# Altium PCB Daemi.PcbDoc (part 2 of 2)
Units mm, origin at the board's own origin, x right, y up, seen from the top; angles counter-clockwise.
Board outline 85 x 85 mm, 2 copper layers (Top Layer, Bottom Layer); 151 components, 56 nets, 527 pads, 120 vias.
Unrouted connection lines stored in the file: 9.
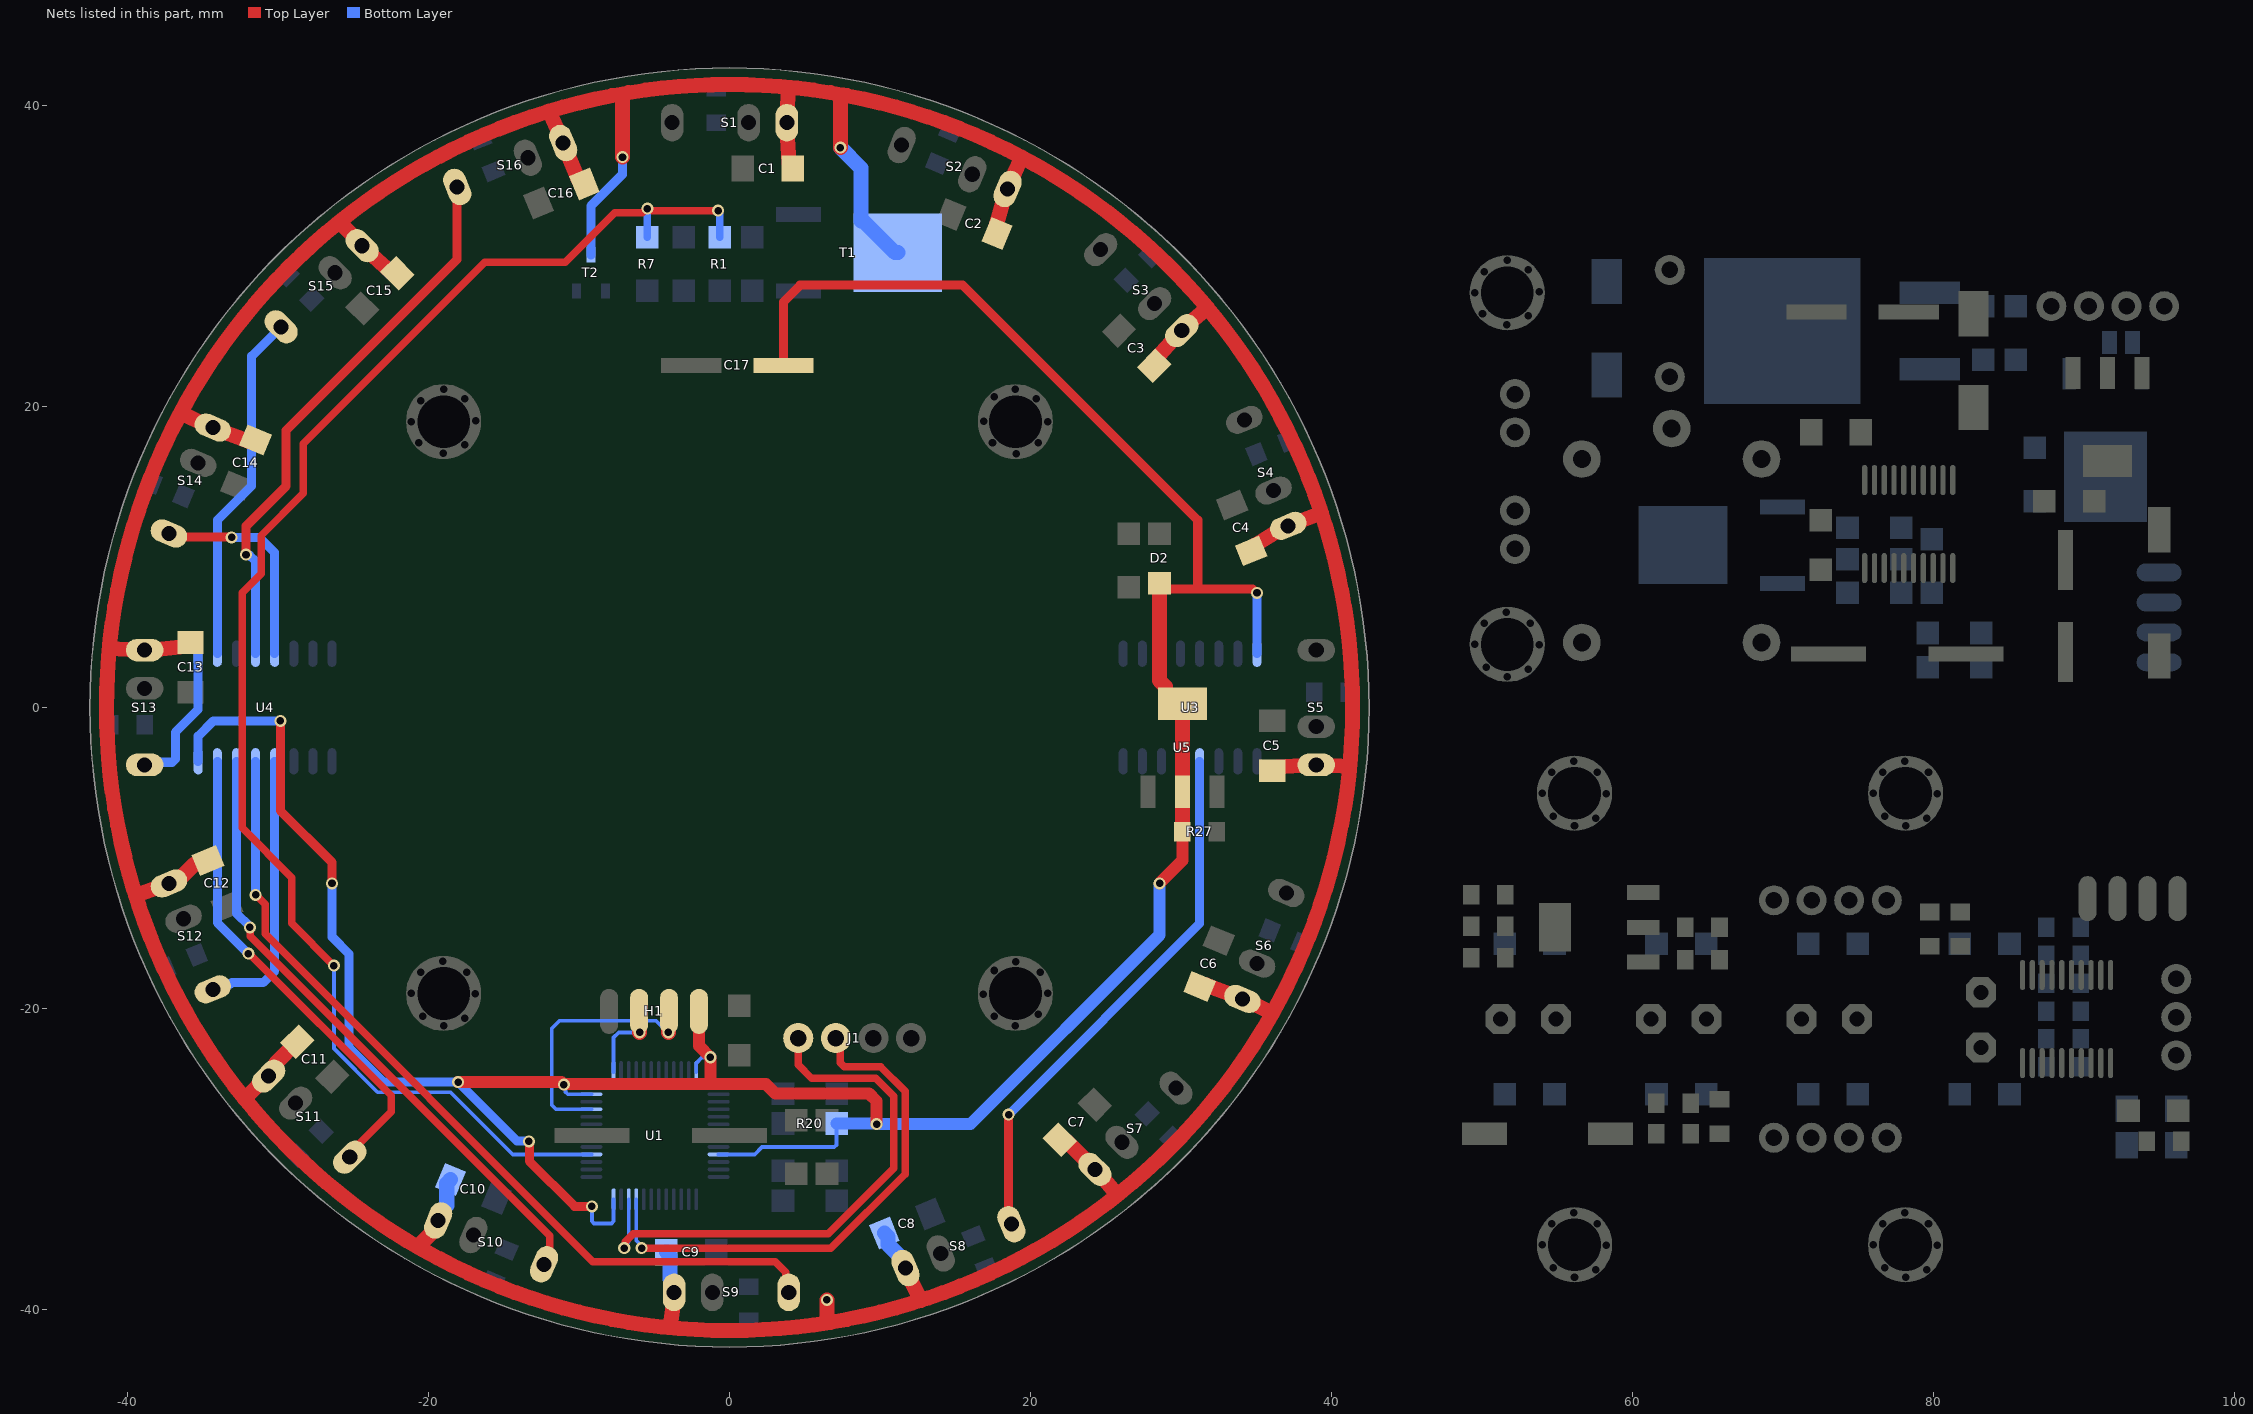
[diagram p2: the nets of this part, all layers, seen from the top]

## Via types
v1: diameter 0.8, hole 0.5, Top Layer to Bottom Layer, tented both sides, 120 vias

## Nets (pads, with @x,y where several pads share a name; then routed paths per layer and width w, separated by ;. In a path a pad name is that pad's centre, name@x,y a point inside that pad or via, vN(x,y) a via of type N, cw(c..) or ccw(c..) an arc to the next point about the centre after c; other vN are vias at no path point) (continued)
S7: S8.3 U3.4 | length 36.1
  Top Layer w0.6: v1(18.542,-27.051) 18.54,-27.053 18.54,-34.147 S8.3@18.73,-34.337
  Bottom Layer w0.6: v1(18.542,-27.051) 31.242,-14.351 U3.4@31.242,-3.575
S8: S9.3 U4.13 | length 57.1
  Top Layer w0.5: v1(-31.496,-12.446) -30.861,-13.081 -30.861,-15.048 -9.079,-36.83 3.048,-36.83 3.746,-37.528 3.746,-38.671 S9.3@3.937,-38.862
  Bottom Layer w0.6: v1(-31.496,-12.446) U4.13@-31.496,-3.575
S9: S10.3 U4.14 | length 42.2
  Top Layer w0.5: v1(-31.877,-14.605) -31.85,-14.632 -31.85,-15.205 -31.289,-15.766 -11.938,-35.117 -11.938,-35.744 -11.943,-35.748 -11.943,-36.616 S10.3@-12.325,-36.999
  Bottom Layer w0.6: U4.14@-32.766,-3.575 -32.766,-13.662 -31.877,-14.551 v1(-31.877,-14.605)
S10: S11.3 U4.15 | length 32.3
  Top Layer w0.5: v1(-31.977,-16.356) -31.906,-16.356 -22.479,-25.783 -22.479,-26.853 -25.237,-29.611 S11.3@-25.237,-29.881
  Bottom Layer w0.6: U4.15@-34.036,-3.575 -34.036,-14.297 v1(-31.977,-16.356)
S11: S12.3 U4.12 | length 18.6
  Bottom Layer w0.6: S12.3@-34.337,-18.73 -33.973,-18.367 -33.152,-18.367 -33.073,-18.288 -30.988,-18.288 -30.226,-17.526 U4.12@-30.226,-3.575
S12: S13.3 U4.1 | length 9.8
  Bottom Layer w0.6: S13.3@-38.862,-3.81 -38.69,-3.638 -37.039,-3.638 -36.83,-3.429 -36.83,-1.651 -35.306,-0.127 U4.1@-35.306,3.575
S13: S14.3 U4.5 | length 14.3
  Top Layer w0.6: S14.3@-37.253,11.563 -37.027,11.337 -33.12,11.337 v1(-33.086,11.303)
  Bottom Layer w0.6: v1(-33.086,11.303) -31.242,11.303 -30.226,10.287 U4.5@-30.226,3.575
S14: S15.3 U4.2 | length 23.5
  Bottom Layer w0.6: U4.2@-34.036,3.575 -34.036,12.446 -31.75,14.732 -31.75,23.346 S15.3@-29.798,25.299
S15: S16.3 U4.4 | length 37.2
  Top Layer w0.6: v1(-32.131,10.16) -32.131,12.053 -29.464,14.72 -29.464,18.415 -18.095,29.784 -18.095,33.694 -18.076,33.713 -18.076,34.572 S16.3@-18.095,34.591
  Bottom Layer w0.6: v1(-32.131,10.16) -32.093,10.122 -31.909,10.122 -31.496,9.709 U4.4@-31.496,3.575
S_GND: C1.2 C2.2 C3.2 C4.2 C5.2 C6.2 C7.2 C8.2 C9.2 C10.2 C11.2 C12.2 C13.2 C14.2 C15.2 C16.2 S1.1 S2.1 S3.1 S4.1 S5.1 S6.1 S7.1 S8.1 S9.1 S10.1 S11.1 S12.1 S13.1 S14.1 S15.1 S16.1 T1.4 T2.3 | length 373
  Top Layer w1: -41.213,3.931 -39.362,3.81 S13.1@-38.862,3.81 -38.362,3.81 -36.189,4.068 C13.2@-35.814,4.318 ; -39.474,-12.479 -37.715,-11.882 S12.1@-37.253,-11.69 -36.847,-11.69 -35.561,-10.404 -34.911,-10.404 C12.2@-34.665,-10.157 ; -36.48,19.575 -34.799,18.795 S14.1@-34.337,18.603 -33.875,18.412 -31.941,17.694 C14.2@-31.499,17.781 ; -32.216,-26.001 -30.708,-24.493 S11.1@-30.625,-24.493 -30.176,-24.044 -30.176,-23.65 C11.2@-28.726,-22.201 ; -25.924,32.278 -24.763,31.04 S15.1@-24.41,30.687 -24.056,30.333 -22.516,28.942 C15.2@-22.074,28.853 ; -20.526,-35.953 -20.526,-35.65 -19.365,-34.489 S10.1@-19.365,-34.083 S10.1@-19.365,-33.677 ; -11.978,39.629 -11.247,37.969 S16.1@-11.055,37.507 -10.864,37.045 -10.026,35.049 C16.2@-9.652,34.798 C16.2@-9.652,34.449 ; -7.198,40.726 -7.112,40.64 v1(-7.112,36.576) ; -3.943,-41.212 -3.683,-39.362 S9.1@-3.683,-38.862 S9.1@-3.683,-38.362 ; 3.919,41.214 3.81,39.362 S1.1@3.81,38.862 3.81,38.362 3.941,36.189 C1.2@4.191,35.814 ; v1(6.477,-39.37) 6.477,-40.724 6.62,-40.867 ; v1(7.366,37.211) 7.366,40.546 7.529,40.71 ; S8.1@11.499,-36.791 S8.1@11.69,-37.253 11.882,-37.715 12.71,-39.401 ; C2.2@17.783,31.502 17.695,31.945 18.285,34.002 S2.1@18.476,34.464 18.668,34.926 19.423,36.561 ; C7.2@21.947,-28.726 22.389,-28.815 23.929,-30.333 S7.1@24.283,-30.687 24.636,-31.04 25.769,-32.403 ; C3.2@28.218,22.709 28.307,23.151 29.698,24.691 S3.1@30.052,25.045 30.405,25.398 31.752,26.566 ; C6.2@31.245,-18.543 31.687,-18.456 33.621,-19.174 S6.1@34.083,-19.365 34.545,-19.557 36.07,-20.321 ; C4.2@34.668,10.413 34.919,10.787 36.664,11.88 S4.1@37.126,12.071 37.588,12.263 39.326,12.94 ; C5.2@36.068,-4.191 36.443,-3.941 38.489,-3.81 S5.1@38.989,-3.81 39.489,-3.81 41.213,-3.931 ; 41.4,0 ccw(c0,0) 41.4,0
  Bottom Layer w0.6: T2.3@-9.205,30.086 -9.205,33.34 -7.112,35.433 v1(-7.112,36.576)
  Bottom Layer w1: S10.1@-19.365,-34.083 -19.365,-33.677 -18.79,-33.102 -18.79,-31.619 C10.2@-18.543,-31.372 ; C9.2@-4.191,-36.195 -3.941,-36.445 -3.941,-37.969 -3.683,-38.227 S9.1@-3.683,-38.862 ; v1(7.366,37.211) 8.736,35.841 8.736,32.326 8.89,32.326 10.99,30.226 T1.4@11.186,30.226 ; C8.2@10.286,-34.922 10.532,-35.168 10.532,-35.689 11.69,-36.847 S8.1@11.69,-37.253
SCL: J1.2 U1.21 | length 35.3
  Top Layer w0.5: v1(-5.842,-35.93) 6.742,-35.93 11.672,-31 11.672,-25.515 10.033,-23.876 7.634,-23.876 7.352,-23.594 7.352,-22.258 J1.2@7.065,-21.971
  Bottom Layer w0.25: U1.21@-6.203,-32.673 -6.203,-35.42 -5.842,-35.781 v1(-5.842,-35.93)
SDA: J1.1 U1.22 | length 37.5
  Top Layer w0.5: v1(-6.996,-35.93) -6.939,-35.873 -6.939,-35.514 -6.388,-34.963 6.566,-34.963 10.922,-30.607 10.922,-25.826 9.722,-24.626 5.449,-24.626 4.565,-23.742 J1.1@4.565,-21.971
  Bottom Layer w0.25: v1(-6.996,-35.93) -6.996,-35.802 -6.703,-35.509 U1.22@-6.703,-32.673
SENSOR_EN: R1.2 R7.2 U1.28 | length 102.2
  Top Layer w0.5: v1(-26.289,-17.145) -29.083,-14.351 -29.083,-11.303 -32.385,-8.001 -32.385,7.62 -31.115,8.89 -31.115,11.43 -28.321,14.224 -28.321,17.543 -16.273,29.591 -10.922,29.591 -7.62,32.893 -5.796,32.893 -5.542,33.147 v1(-5.461,33.147) -5.404,33.09 -5.191,33.09 -5.122,33.02 v1(-0.762,33.02)
  Bottom Layer w0.25: v1(-26.289,-17.145) -26.289,-22.661 -23.383,-25.567 -18.54,-25.567 -14.409,-29.698 U1.28@-9.178,-29.698
  Bottom Layer w0.5: R7.2@-5.461,31.242 v1(-5.461,33.147) ; v1(-0.762,33.02) -0.762,32.939 -0.635,32.812 R1.2@-0.635,31.242
SWCLK: H1.3 U1.37 | length 5.6
  Top Layer w0.25: H1.3@-6.054,-20.235 H1.3@-6.011,-20.193
  Top Layer w1: H1.3@-6.054,-20.235 -5.973,-20.316 -5.973,-21.586 v1(-5.969,-21.59)
  Bottom Layer w0.25: U1.37@-7.703,-24.223 -7.703,-21.927 -7.366,-21.59 v1(-5.969,-21.59)
SWIO: H1.2 U1.34 | length 17.5
  Top Layer w1: v1(-4.064,-21.59) -4.06,-21.586 -4.06,-20.231 H1.2@-4.022,-20.193
  Bottom Layer w0.25: U1.34@-9.178,-26.698 -11.529,-26.698 -11.811,-26.416 -11.811,-21.336 -11.29,-20.815 -4.879,-20.815 -4.104,-21.59 v1(-4.064,-21.59)
VCC: C17.2 D2.1 H1.1 R20.1 R27.2 U1.9 U1.24 U1.36 U1.48 U3.16 U4.16 U5.2 U5.4 | length 210.6
  Top Layer w0.6: v1@-29.845,-0.943 -29.845,-6.858 -26.416,-10.287 v1(-26.416,-11.684) ; v1(-13.335,-28.829) -13.297,-28.867 -13.297,-30.137 -10.287,-33.147 v1(-9.144,-33.147) ; C17.2@3.578,22.736 3.578,26.946 4.699,28.067 15.494,28.067 31.115,12.446 31.115,7.874 ; D2.1@28.575,8.255 28.956,7.874 31.115,7.874 ; v1(35.052,7.62) 34.998,7.62 34.744,7.874 31.115,7.874
  Top Layer w0.8: v1(-18.034,-24.892) -11.176,-24.892 v1(-11.007,-25.061) -10.965,-25.019 -1.27,-25.019 ; H1.1@-2.032,-20.193 -2.032,-22.479 v1(-1.27,-23.241) -1.27,-25.019 ; v1(9.779,-27.686) 9.779,-26.162 9.271,-25.654 3.048,-25.654 2.413,-25.019 -1.27,-25.019 ; v1(28.575,-11.684) 30.099,-10.16 R27.2@30.099,-8.255
  Top Layer w1: D2.1@28.575,8.255 28.575,1.782 28.974,1.383 28.974,0.833 29.549,0.258 U5.4@30.099,0.258 U5.2@30.099,-5.592 R27.2@30.099,-8.255
  Bottom Layer w0.25: v1(-11.007,-25.061) -10.902,-25.166 -10.902,-25.547 -10.753,-25.696 U1.36@-9.178,-25.696 ; v1(-9.144,-33.147) -9.144,-34.144 -8.998,-34.29 -7.849,-34.29 -7.703,-34.144 U1.24@-7.703,-32.673 ; U1.48@-2.203,-24.223 -2.203,-23.623 -1.844,-23.264 -1.293,-23.264 v1(-1.27,-23.241) ; U1.9@-0.728,-29.698 1.671,-29.698 2.159,-29.21 6.966,-29.21 7.112,-29.064 R20.1@7.112,-27.644
  Bottom Layer w0.6: U4.16@-35.306,-3.575 -35.306,-1.905 -34.29,-0.889 v1(-29.845,-0.889) ; v1(-26.416,-11.684) -26.416,-15.24 -25.273,-16.383 -25.273,-22.606 -22.987,-24.892 v1@-18.024,-24.892 ; v1@-17.996,-24.93 -14.135,-28.791 -13.373,-28.791 v1(-13.335,-28.829) ; U3.16@35.052,3.575 v1(35.052,7.62)
  Bottom Layer w0.8: R20.1@7.112,-27.644 9.737,-27.644 v1(9.779,-27.686) 16.002,-27.686 28.575,-15.113 v1(28.575,-11.684)
pads on no net: 1. 1.1 2. 2.1 3. 3.1 ?. ?.1 _1. _1.1 _2. _2.1 C1_1.1 C1_1.2 C2_1.1 C2_1.2 C3_1.1 C3_1.2 C20.1 C20.2 CAP.1 CAP.2 D1_1.1 D1_1.2 D1_2.1 D1_2.2 D2_1.1 D2_1.2 D2_2.1 D2_2.2 D3.1 D3.2 D3_1.1 D3_1.2 D4.1 D4.2 D4_1.1 D4_1.2 D5.1 D5.2 D6.1 D6.2 D7.1 D7.2 D8.1 D8.2 D9.1 D9.2 FDD.1 FDD.3 FDD.4 H1_1.1 H1_1.2 H1_1.3 H1_1.4 I1.1 I1.2 IRF.1 IRF.3 IRF.4 J1_1.1 J1_1.2 J1_1.3 J1_1.4 J2.1 J2.2 J2.3 J3.1 J3.2 J3.3 J3.4 PROG.1 PROG.2 PROG.3 PROG.4 R1_1.1 R1_1.2 R2_1.1 R2_1.2 R3_1.1 R3_1.2 R3_2.1 R3_2.2 R4_1.1 R4_1.2 R4_2.1 R4_2.2 R5_1.1 R5_1.2 R5_2.1 R5_2.2 R6_1.1 R6_1.2 R6_2.1 R6_2.2 R7_1.1 R7_1.2 R7_2.1 R7_2.2 R8_1.1 R8_1.2 R8_2.1 R8_2.2 R9_1.1 R9_1.2 R9_2.1 R9_2.2 R10_1.1 R10_1.2 R10_2.1 R10_2.2 R11_1.1 R11_1.2 R11_2.1 R11_2.2 R12_1.1 R12_1.2 R13_1.1 R13_1.2 R14_1.1 R14_1.2 R15_1.1 R15_1.2 R16_1.1 R16_1.2 R17_1.1 R17_1.2 RELAY.1 RELAY.2 RELAY.3 RELAY.4 RELAY.5 S1_1.1 S1_1.2 S2_1.1 S2_1.2 S3_1.1 S3_1.2 S4_1.1 S4_1.2 SHOOT.1 SHOOT.2 STM32.1 STM32.2 STM32.3 STM32.4 STM32.5 STM32.6 STM32.7 STM32.8 STM32.9 STM32.10 STM32.11 STM32.12 STM32.13 STM32.14 STM32.15 STM32.16 STM32.17 STM32.18 STM32.19 STM32.20 SW1.1 SW1.2 SW1_1.1 SW1_1.2 U1.1 U1.3 U1.4 U1.12 U1.13 U1.14 U1.15 U1.16 U1.17 U1.18 U1.19 U1.20 U1.29 U1.30 U1.31 U1.32 U1.33 U1.38 U1.39 U1.40 U1.41 U1.42 U1.43 U1.45 U1.46 U1_1.1 U1_1.2 U1_1.3 U1_1.4 U1_1.5 U1_1.6 U1_1.7 U1_1.8 U1_1.9 U1_1.10 U1_1.11 U1_1.12 U1_1.13 U1_1.14 U1_1.15 U1_1.16 U1_1.17 U1_1.18 U1_1.19 U1_1.20 U1_2.1 U1_2.2 U2_1.1 U2_1.2 U2_1.3 U2_1.4 U141.1 U141.2 U173.1 U173.3 U173.4 U174.1 U174.2 U174.3 U174.4 U175.1 U175.2 U175.3 U175.4 U177.1 U177.2
copper on no net: | length 1450.3
  Top Layer w0.3: v1(49.911,-24.257) 49.911,-24.19 49.552,-23.831 49.552,-18.21 49.728,-18.034 51.132,-18.034 51.308,-17.858 51.308,-16.891 51.562,-16.637 ; 51.247,-20.701 53.934,-23.388 78.982,-23.388 79.744,-23.388 81.154,-24.798 81.154,-25.56 81.154,-26.861 81.154,-27.544 83.137,-29.528 88.328,-29.528 91.127,-26.729 91.127,-23.626 91.127,-22.176 91.333,-21.97 92.701,-21.97 92.956,-22.225 v1(93.091,-22.225) ; 58.547,-28.321 58.547,-24.553 59.162,-23.938 79.517,-23.938 80.604,-25.025 80.604,-27.772 82.06,-29.228 v1@82.06,-30.078 ; 61.247,-20.701 61.411,-20.865 62.521,-20.865 64.494,-22.838 79.21,-22.838 79.972,-22.838 81.704,-24.57 81.704,-25.332 81.704,-26.633 81.704,-27.316 83.365,-28.978 88.101,-28.978 90.477,-26.601 90.477,-23.626 90.477,-21.6 90.657,-21.42 93.591,-21.42 93.906,-21.105 v1(94.042,-21.105) ; 69.399,-28.59 69.399,-26.7 70.74,-25.358 78.698,-25.358 79.121,-25.781 79.121,-27.316 78.725,-27.712 v1(78.725,-27.848) ; v1(70.866,6.223) 74.93,6.223 75.434,6.727 75.434,9.267 ; 71.247,-20.701 71.505,-20.959 72.521,-20.959 73.85,-22.288 79.438,-22.288 80.2,-22.288 82.254,-24.342 82.254,-25.104 82.254,-26.405 82.254,-27.089 83.593,-28.428 87.873,-28.428 89.827,-26.473 89.827,-23.626 89.827,-21.472 90.452,-20.847 92.564,-20.847 92.699,-20.712 92.956,-20.712 v1(93.052,-20.616) ; 71.899,-28.59 71.899,-26.526 72.517,-25.908 77.216,-25.908 77.526,-26.218 77.526,-26.251 77.936,-26.662 v1(77.936,-26.797) ; v1(73.279,14.732) 73.918,14.093 73.918,12.823 74.168,12.573 75.899,12.573 76.074,12.749 76.074,15.107 76.084,15.117 ; v1(74.295,15.875) 74.336,15.834 75.411,15.834 75.434,15.81 75.434,15.117 ; 74.405,-12.812 75.914,-11.303 80.254,-11.303 80.847,-11.896 86.969,-11.896 87.877,-12.804 87.877,-17.776 ; 75.184,18.288 75.438,18.542 78.034,18.542 ; 76.905,-12.812 77.23,-12.487 77.89,-12.487 77.931,-12.446 86.741,-12.446 87.227,-12.932 87.227,-17.776 ; 77.384,9.267 77.384,5.801 77.851,5.334 v1(79.121,5.334) ; 78.034,15.117 78.034,18.542 ; v1(81.407,-11.092) 81.542,-11.092 81.796,-11.346 87.197,-11.346 88.527,-12.676 88.527,-17.776 ; 81.788,-13.589 82.188,-13.989 82.397,-13.989 83.521,-15.113 84.93,-15.113 85.106,-15.289 85.106,-19.574 85.725,-20.193 v1@87.503,-20.193 ; v1(82.076,-30.078) 88.556,-30.078 91.777,-26.857 91.777,-23.626 ; 83.152,-22.606 82.804,-22.954 82.804,-26.861 83.821,-27.878 87.645,-27.878 89.177,-26.346 89.177,-23.626 89.177,-21.345 90.225,-20.297 92.114,-20.297 92.726,-19.685 93.591,-19.685 93.845,-19.939 v1(93.98,-19.939) ; 83.152,-18.923 83.152,-19.176 84.709,-20.733 84.709,-26.797 85.24,-27.328 87.417,-27.328 88.527,-26.218 88.527,-23.626 ; v1(83.312,-13.335) 83.447,-13.335 83.705,-13.077 85.34,-13.077 86.577,-14.314 86.577,-17.776 ; v1(84.836,-14.097) 84.932,-14.193 85.409,-14.193 85.927,-14.711 85.927,-17.776 ; 85.927,-23.626 85.937,-23.616 85.937,-21.505 86.265,-21.177 88.567,-21.177 90.018,-19.726 91.907,-19.726 93.345,-18.288 v1(93.345,-16.637) ; v1(86.768,-26.262) 87.53,-26.262 87.877,-25.915 87.877,-23.626 ; v1(87.503,-19.939) v1@87.503,-20.193 ; 90.255,-12.7 90.255,-15.282 89.177,-16.36 89.177,-17.776 89.167,-17.786 89.167,-19.418 88.392,-20.193 v1@87.503,-20.193 ; 90.477,-17.776 90.477,-16.076 91.313,-15.24 95.377,-15.24 96.139,-16.002 96.139,-18.034 ; 91.567,16.379 91.055,16.891 80.981,16.891 79.33,18.542 78.034,18.542 ; 94.18,-28.829 94.488,-28.521 94.488,-24.765 96.139,-23.114 ; 96.139,-20.574 97.602,-19.111 97.602,-15.814 96.248,-14.46 96.248,-12.725 96.224,-12.7
  Top Layer w0.35: 72.517,12.446 73.015,11.948 78.242,11.948 79.334,13.04 79.334,15.117 ; 73.025,3.556 73.35,3.881 75.89,3.881 76.084,4.075 76.084,9.267 ; 76.734,9.267 76.734,4.165 77.089,3.81 81.915,3.81 82.169,3.556 ; 78.034,9.267 78.034,6.802 78.486,6.35 86.233,6.35 86.614,5.969 86.614,3.937 86.868,3.683 88.392,3.683 ; 78.684,15.117 78.684,16.454 v1(79.121,16.891) ; 79.984,9.267 79.984,11.658 v1(80.01,11.684) ; 80.634,15.117 80.634,13.346 81.28,12.7 83.82,12.7 84.836,13.716 v1(84.836,16.002)
  Top Layer w0.5: 49.276,-12.446 49.276,-14.541 49.276,-16.637 49.276,-16.737 48.852,-17.161 48.852,-25.361 49.145,-25.654 53.848,-25.654 54.483,-26.289 54.483,-29.21 55.118,-29.845 63.53,-29.845 63.881,-29.494 v1(63.881,-28.575) ; 65.786,-28.321 66.086,-28.021 66.721,-28.021 70.084,-24.658 71.608,-24.658 71.628,-24.638 79.248,-24.638 79.883,-25.273 79.883,-28.509 80.772,-29.398 v1(80.772,-29.479) ; 65.786,-26.035 65.827,-26.035 66.127,-25.735 66.127,-25.115 66.42,-24.822 67.664,-24.822 v1(67.691,-24.849) ; 65.786,-16.764 67.108,-16.764 68.072,-15.8 v1(68.072,-15.748) ; v1(69.963,8.255) 69.963,13.956 71.882,15.875 71.882,18.288 ; v1(89.874,-29.897) 89.927,-29.951 93.158,-29.951 94.18,-28.929 94.18,-28.829 ; 92.964,-26.797 93.345,-26.416 93.345,-23.368 96.139,-20.574
  Top Layer w0.6: 51.562,-14.541 52.768,-14.541 v1(52.832,-14.605) ; 51.562,-12.446 52.832,-12.446 53.594,-11.684 v1(55.118,-11.684) ; 56.642,16.51 56.642,16.129 58.039,14.732 62.992,14.732 68.707,20.447 78.486,20.447 81.292,17.641 86.094,17.641 v1(87.503,19.05) ; v1(59.944,-25.654) 59.998,-25.654 60.283,-25.939 61.345,-25.939 61.595,-26.189 61.595,-26.289 ; 71.905,-12.812 73.571,-14.478 78.232,-14.478 78.871,-13.839 79.506,-13.839 79.756,-13.589 81.788,-13.589 ; v1(79.756,-17.653) 79.756,-15.875 ; v1@81.636,11.811 85.925,11.811 86.052,11.938 v1(86.106,11.938) ; v1(81.788,-17.145) 81.788,-15.875 ; v1(90.896,-28.875) 92.283,-28.875 92.964,-28.194 92.964,-26.797 ; 94.546,12.954 94.996,12.504
  Top Layer w0.8: 63.881,-26.289 63.881,-28.321 65.786,-28.321 ; v1(84.836,10.033) 84.958,10.033 85.212,10.287 88.77,10.287 ; 88.643,10.287 88.643,10.88
  Top Layer w1: 54.93,-20.701 54.895,-20.666 54.895,-18.542 ; v1(57.912,-16.891) 57.926,-16.905 60.71,-16.905 63.45,-16.905 63.5,-16.855 63.5,-16.764 ; 58.547,-28.321 61.595,-28.321 ; 60.71,-12.305 65.186,-12.305 65.693,-12.812 ; 63.5,-14.605 60.71,-14.605 54.86,-14.605 54.895,-14.64 54.895,-18.542 ; 64.637,-19.939 64.637,-19.128 64.051,-18.542 54.895,-18.542 ; 64.637,-19.685 69.342,-19.685 70.612,-18.415 72.644,-18.415 75.223,-20.994 75.801,-20.994 76.016,-21.209 80.796,-21.209 83.082,-18.923 83.152,-18.923 ; 64.93,-20.701 64.93,-19.939 ; 65.786,-14.605 65.786,-12.905 65.693,-12.812 ; v1(68.834,-18.326) 69.405,-17.755 69.405,-12.812 65.693,-12.812 ; v1(69.963,8.255) 71.628,8.255 72.517,9.144 ; 71.882,26.286 72.241,26.286 72.241,29.052 72.136,29.157 ; 78.359,23.622 78.359,26.289 ; 82.677,19.939 82.677,20.328 83.177,20.828 v1(87.122,20.828) ; 88.773,3.683 88.773,3.464 91.44,3.464 ; 89.267,22.229 89.267,23.608 89.535,23.876 89.535,23.925 90.121,24.511 91.821,24.511 92.646,25.336 92.646,26.479 92.837,26.67 ; 91.567,22.229 91.567,16.379 91.567,3.591 91.44,3.464 ; v1(93.853,23.876) 93.867,23.862 93.867,22.229 ; 94.871,3.304 94.996,3.179 v1(94.996,2.921) 94.996,3.214 94.746,3.464 91.44,3.464 ; 94.996,3.429 94.996,4.179 ; 94.996,11.811 94.996,12.504 94.996,12.561 95.631,13.196 95.631,26.105 95.337,26.399 95.337,26.67 ; 96.266,-26.797 96.416,-26.947 96.416,-28.779 96.466,-28.829
  Top Layer w2: 62.484,21.971 65.278,21.971 66.929,23.622 78.359,23.622 ; v1(69.963,8.255) 60.071,8.255 55.245,13.081 52.197,13.081 52.197,18.288 53.848,18.288 57.15,21.59 57.15,24.003 58.674,25.527 63.5,25.527 67.13,29.157 72.136,29.157 91.665,29.157 92.837,27.985 92.837,26.67 ; 77.851,23.622 81.034,20.439 82.677,20.439 82.677,20.328 ; 82.677,26.035 82.677,26.289 87.456,26.289 87.837,26.67
  Bottom Layer w0.3: v1(70.866,6.223) 70.866,3.429 71.629,2.666 79.629,2.666 ; 74.405,-12.812 74.645,-12.812 77.978,-16.145 77.978,-26.755 v1(77.936,-26.797) ; 76.905,-12.812 76.905,-14.294 78.74,-16.129 78.74,-27.833 v1(78.725,-27.848) ; v1(81.407,-11.092) 81.407,-11.176 80.56,-12.023 80.56,-18.323 81.16,-18.923 83.152,-18.923 ; v1(83.312,-13.335) 83.989,-12.658 93.303,-12.658 v1(94.234,-13.589) ; 84.512,-15.156 85.057,-15.701 ; v1(84.836,-14.097) 85.725,-14.097 86.614,-13.208 91.813,-13.208 92.067,-13.462 v1(92.202,-13.462) ; v1(86.768,-26.262) 86.587,-26.262 86.336,-26.011 86.336,-17.71 86.357,-17.689 86.357,-14.862 86.614,-14.605 87.503,-14.605 ; 89.789,-23.88 90.629,-23.88 90.805,-23.704 90.805,-22.417 90.981,-22.241 93.075,-22.241 v1(93.091,-22.225) ; 89.789,-22.025 89.789,-21.925 90.293,-21.421 93.59,-21.421 93.906,-21.105 v1(94.042,-21.105) ; 89.789,-20.17 89.789,-20.183 90.189,-20.583 90.189,-20.616 v1(93.052,-20.616) ; 89.789,-18.315 89.789,-18.415 90.189,-18.815 90.57,-18.815 91.313,-19.558 93.554,-19.558 93.935,-19.939 v1(93.98,-19.939) ; 89.789,-16.46 93.033,-16.46 93.21,-16.637 v1(93.345,-16.637)
  Bottom Layer w0.35: 62.611,18.542 62.865,18.796 71.247,18.796 71.882,18.161 71.882,14.732 73.72,12.894 73.72,12.513 74.295,11.938 ; 77.851,9.865 78.064,9.652 81.456,9.652 81.661,9.857 81.661,11.732 v1(81.582,11.811) ; v1(79.121,16.891) 79.121,21.904 79.696,22.479 79.756,22.479 ; 79.883,7.62 80.064,7.439 80.953,7.439 81.407,6.985 81.407,3.169 81.91,2.666 83.185,2.666
  Bottom Layer w0.6: v1(59.944,-25.654) 59.968,-25.678 61.575,-25.678 61.598,-25.701 ; 71.905,-12.812 70.351,-14.366 67.295,-14.366 66.61,-15.051 66.61,-25.462 68.184,-27.036 73.763,-27.036 74.131,-27.404 74.131,-28.322 74.399,-28.59 ; v1(73.279,14.732) 74.306,13.705 82.231,13.705 82.582,13.354 82.582,7.966 85.041,5.507 91.905,5.507 92.416,4.995 94.996,4.995 ; v1(74.295,15.875) 75.565,14.605 82.645,14.605 83.482,13.768 83.482,8.434 83.693,8.223 83.693,8.128 85.414,6.407 92.132,6.407 92.71,6.985 95.123,6.985 ; v1(79.756,-17.653) 79.756,-23.702 81.755,-25.701 ; v1(80.772,-29.479) 80.772,-29.425 81.223,-28.973 81.223,-28.829 88.773,-28.829 89.841,-29.897 v1(89.874,-29.897) ; 81.755,-15.701 81.772,-15.717 81.772,-17.129 v1(81.788,-17.145) ; 83.152,-18.923 85.057,-18.923 ; 83.185,4.953 83.531,4.607 91.532,4.607 93.133,3.006 v1@94.996,3.006 ; v1(84.836,16.002) 84.836,16.056 85.09,16.31 85.09,22.733 85.471,23.114 ; v1(86.106,11.938) 86.16,11.938 87.049,11.049 v1(95.25,11.049) ; 87.503,-16.46 87.503,-18.315 v1(87.503,-19.939) 87.503,-20.17 87.503,-22.025 87.503,-23.88 87.753,-24.13 87.753,-24.795 88.104,-25.146 91.186,-25.146 91.44,-24.892 96.139,-24.892 ; v1(87.503,19.05) 88.138,19.685 92.837,19.685 93.853,20.701 93.853,22.675 93.84,22.688 ; 89.789,-14.605 93.98,-14.605 94.361,-14.986 94.361,-18.796 96.139,-20.574 ; v1(90.896,-28.875) 90.95,-28.875 91.158,-29.083 92.837,-29.083 ; 96.139,-29.083 96.139,-26.67 96.139,-24.892 ; 96.139,-23.114 96.139,-24.892
  Bottom Layer w0.8: v1(49.911,-24.257) 50.007,-24.353 50.171,-24.353 51.52,-25.701 ; 51.52,-15.701 52.12,-15.101 52.12,-14.846 52.295,-14.67 52.767,-14.67 v1(52.832,-14.605) ; v1(55.118,-11.684) 55.88,-12.446 61.129,-12.446 61.598,-12.915 61.598,-15.701 ; v1(67.691,-24.849) 68.543,-25.701 71.677,-25.701 ; v1(68.072,-15.748) 71.63,-15.748 71.677,-15.701 ; v1(68.834,-18.326) 68.834,-22.367 69.303,-22.835 74.905,-22.835 76.707,-24.637 76.707,-28.399 76.899,-28.59 ; 74.93,-20.701 74.954,-20.677 74.954,-17.272 ; 74.979,-25.701 74.629,-25.351 74.629,-24.85 73.98,-24.201 68.778,-24.201 67.691,-23.114 67.691,-17.858 68.277,-17.272 74.954,-17.272 ; 74.979,-15.701 74.954,-15.725 74.954,-17.272
  Bottom Layer w1: v1(51.181,-28.067) 51.308,-28.194 54.229,-28.194 54.822,-27.601 54.822,-15.701 ; v1(57.912,-16.891) 57.912,-27.94 58.547,-28.575 v1(63.881,-28.575) ; 64.65,-25.951 64.9,-25.701 64.9,-15.701 ; v1(69.963,8.255) 71.628,8.255 72.237,7.646 72.237,5.793 72.823,5.207 77.015,5.207 77.601,5.793 77.601,7.37 77.851,7.62 79.883,7.62 ; 69.963,13.335 71.55,13.335 72.136,12.749 72.136,10.498 72.722,9.913 74.045,9.913 74.093,9.865 74.295,9.865 74.295,7.62 ; 77.851,11.938 79.756,11.938 v1(80.01,11.684) ; 79.591,27.559 79.739,27.41 82.574,27.41 83.315,26.67 85.725,26.67 ; 79.756,22.479 83.065,22.479 ; 83.315,23.114 83.065,22.864 83.065,22.479 ; 85.057,-15.701 85.057,-18.923 85.057,-25.701 85.307,-25.951 85.307,-26.432 86.434,-27.559 92.036,-27.559 92.837,-26.758 92.837,-26.67 92.837,-29.083 ; 86.741,17.272 90.006,17.272 91.44,15.838 ; v1(87.122,20.828) 87.122,22.098 87.757,22.733 88.995,22.733 89.04,22.688 ; 90.337,26.67 90.337,24.55 90.63,24.257 91.567,24.257 91.694,24.13 ; 93.84,22.688 93.853,22.701 v1(93.853,23.876) ; 94.996,8.975 92.837,8.975 92.541,8.975 91.186,7.62 85.852,7.62 84.582,8.89 84.582,14.224 83.065,15.741 83.065,22.479
  Bottom Layer w2: 52.197,10.541 54.737,10.541 56.896,8.382 56.896,4.318 ; 52.197,13.081 52.197,18.288 ; 52.197,20.828 53.467,22.098 58.293,22.098 58.293,20.574 60.229,18.638 62.515,18.638 62.611,18.542 ; 58.293,28.321 58.293,28.821 62.222,28.821 62.484,29.083 63.587,27.98 66.025,27.98 69.875,24.13 ; 63.363,10.795 63.713,10.795 65.313,12.395 65.313,15.021 66.548,16.256 68.191,16.256 68.445,16.51 68.58,16.51
  other v1: 86.868,13.716

## Polygon pours and split planes (outlines as drawn)
no net on Bottom Layer "NONET_L02_P003" (solid, pour order 3): 81.652,-35.701 81.652,-31.971 cw(c82.922,-31.971) 82.922,-30.701 98.152,-30.701 98.152,-10.701 82.922,-10.701 cw(c82.922,-9.431) 81.652,-9.431 81.652,-5.701 ccw(c78.152,-5.701) 74.652,-5.701 74.652,-9.431 cw(c73.382,-9.431) 73.382,-10.701 60.922,-10.701 cw(c60.922,-9.431) 59.652,-9.431 59.652,-5.701 ccw(c56.152,-5.701) 52.652,-5.701 52.652,-9.431 cw(c51.382,-9.431) 51.382,-10.701 48.152,-10.701 48.152,-30.701 51.382,-30.701 cw(c51.382,-31.971) 52.652,-31.971 52.652,-35.701 ccw(c56.152,-35.701) 59.652,-35.701 59.652,-31.971 cw(c60.922,-31.971) 60.922,-30.701 73.382,-30.701 cw(c73.382,-31.971) 74.652,-31.971 74.652,-35.701 ccw(c78.152,-35.701)
no net on Bottom Layer "NONET_L02_P005" (solid, pour order 5): 97.155,1.143 48.641,1.143 48.641,30.607 97.155,30.607
GND on Bottom Layer "GND_L02_P001" (solid, pour order 1): -42.5,0 ccw(c0,0) 0,-42.5 ccw(c0,0) 42.5,0 ccw(c0,0) 0,42.5 ccw(c0,0)
no net on Top Layer "NONET_L01_P002" (solid, pour order 2): 81.652,-35.701 81.652,-31.971 cw(c82.922,-31.971) 82.922,-30.701 98.152,-30.701 98.152,-10.701 82.922,-10.701 cw(c82.922,-9.431) 81.652,-9.431 81.652,-5.701 ccw(c78.152,-5.701) 74.652,-5.701 74.652,-9.431 cw(c73.382,-9.431) 73.382,-10.701 60.922,-10.701 cw(c60.922,-9.431) 59.652,-9.431 59.652,-5.701 ccw(c56.152,-5.701) 52.652,-5.701 52.652,-9.431 cw(c51.382,-9.431) 51.382,-10.701 48.152,-10.701 48.152,-30.701 51.382,-30.701 cw(c51.382,-31.971) 52.652,-31.971 52.652,-35.701 ccw(c56.152,-35.701) 59.652,-35.701 59.652,-31.971 cw(c60.922,-31.971) 60.922,-30.701 73.382,-30.701 cw(c73.382,-31.971) 74.652,-31.971 74.652,-35.701 ccw(c78.152,-35.701)
no net on Top Layer "NONET_L01_P004" (solid, pour order 4): 97.155,1.143 48.641,1.143 48.641,30.607 97.155,30.607
GND on Top Layer "GND_L01_P000" (solid, pour order 0): -42.5,0 ccw(c0,0) 0,-42.5 ccw(c0,0) 42.5,0 ccw(c0,0) 0,42.5 ccw(c0,0)

## Keep-outs
Keep-Out Layer:
  circle w0.3: c0,0 r42.5
  lines w0.3: -25,-15 -25,15 -17.766,15 -15,17.766 15,17.766 17.766,15 25,15 25,-15 17.893,-15 15,-17.893 -15,-17.893 -17.893,-15 -25,-15 ; 48.152,-30.701 51.382,-30.701 cw(c51.382,-31.971) 52.652,-31.971 52.652,-35.701 ccw(c56.152,-35.701) 59.652,-35.701 59.652,-31.971 cw(c60.922,-31.971) 60.922,-30.701 73.382,-30.701 cw(c73.382,-31.971) 74.652,-31.971 74.652,-35.701 ccw(c78.152,-35.701) 81.652,-35.701 81.652,-31.971 cw(c82.922,-31.971) 82.922,-30.701 98.152,-30.701 98.152,-10.701 87.922,-10.701 82.922,-10.701 cw(c82.922,-9.431) 81.652,-9.431 81.652,-5.701 ccw(c78.152,-5.701) 74.652,-5.701 74.652,-9.431 cw(c73.382,-9.431) 73.382,-10.701 60.922,-10.701 cw(c60.922,-9.431) 59.652,-9.431 59.652,-5.701 ccw(c56.152,-5.701) 52.652,-5.701 52.652,-9.431 cw(c51.382,-9.431) 51.382,-10.701 48.152,-10.701 48.152,-30.701 ; 48.641,1.143 97.663,1.143 97.663,30.607 48.641,30.607 48.641,1.143

## Other copper
Bottom Layer:
  text "+" at 50.332,20.447 h1 r90
  text "-" at 50.284,18.161 h1 r90
  text "-" at 50.284,12.446 h1 r90
  text "+" at 50.332,10.287 h1 r90

## Silkscreen, mask and mechanical layers (free items; w line width, h text height)
Bottom Overlay:
  text "+" at 50.332,20.447 h1 r90
  text "-" at 50.284,18.161 h1 r90
  text "-" at 50.284,12.446 h1 r90
  text "+" at 50.332,10.287 h1 r90
Top Solder:
  circle w0.3: c0,0 r42.5
  lines w0.3: 48.641,1.143 48.641,30.607 97.663,30.607 97.663,1.143 48.641,1.143
Bottom Solder:
  circle w0.3: c0,0 r42.5
  lines w0.3: 48.641,1.143 97.663,1.143 97.663,30.607 48.641,30.607 48.641,1.143
  text "+" at 50.332,20.447 h1 r90
  text "-" at 50.284,18.161 h1 r90
  text "-" at 50.284,12.446 h1 r90
  text "+" at 50.332,10.287 h1 r90
Mechanical 1:
  circle w0.3: c0,0 r42.5
  lines w0.3: -25,-15 -25,15 -17.766,15 -15,17.766 15,17.766 17.766,15 25,15 25,-15 17.893,-15 15,-17.893 -15,-17.893 -17.893,-15 -25,-15 ; 48.641,1.143 97.663,1.143 97.663,30.607 48.641,30.607 48.641,1.143

## Text inside footprints (layer, text, board x,y; h text height)
H1: Top Overlay "3V3" at -2.109,-22.021 h0.3 r270; Top Overlay "SWDIO" at -4.141,-22.021 h0.3 r270; Top Overlay "SWCLK" at -6.11,-22.012 h0.3 r270; Top Overlay "GND" at -8.077,-22.038 h0.3 r270
H1_1: Top Overlay "3V3" at 96.147,-14.528 h0.3 r270; Top Overlay "SWDIO" at 94.115,-14.528 h0.3 r270; Top Overlay "SWCLK" at 92.146,-14.519 h0.3 r270; Top Overlay "GND" at 90.179,-14.545 h0.3 r270
PROG: Bottom Overlay "GND" at 91.827,9.177 h0.3 r180; Bottom Overlay "SWDIO" at 91.277,5.242 h0.3 r180; Bottom Overlay "3V3" at 91.827,3.21 h0.3 r180; Bottom Overlay "SWCLK" at 91.227,7.21 h0.3 r180
S1: Top Overlay "O" at -3.609,41.349 h0.8 r180; Top Overlay "-" at 4.011,41.241 h0.8 r180; Top Overlay "+" at 1.598,41.228 h0.8 r180
S2: Top Overlay "O" at 12.574,39.6 h0.8 r157.5; Top Overlay "-" at 19.572,36.585 h0.8 r157.5; Top Overlay "+" at 17.338,37.496 h0.8 r157.5
S3: Top Overlay "O" at 26.564,32.049 h0.8 r135; Top Overlay "-" at 31.876,26.585 h0.8 r135; Top Overlay "+" at 30.161,28.282 h0.8 r135
S4: Top Overlay "O" at 36.584,19.877 h0.8 r112.5; Top Overlay "-" at 39.4,12.796 h0.8 r112.5; Top Overlay "+" at 38.465,15.02 h0.8 r112.5
S5: Top Overlay "O" at 41.476,3.609 h0.8 r90; Top Overlay "-" at 41.368,-4.011 h0.8 r90; Top Overlay "+" at 41.355,-1.598 h0.8 r90
S6: Top Overlay "O" at 39.219,-13.463 h0.8 r67.5; Top Overlay "-" at 36.204,-20.461 h0.8 r67.5; Top Overlay "+" at 37.115,-18.227 h0.8 r67.5
S7: Top Overlay "O" at 31.287,-27.199 h0.8 r45; Top Overlay "-" at 25.823,-32.511 h0.8 r45; Top Overlay "+" at 27.52,-30.796 h0.8 r45
S8: Top Overlay "O" at 19.496,-36.711 h0.8 r22.5; Top Overlay "-" at 12.415,-39.527 h0.8 r22.5; Top Overlay "+" at 14.639,-38.592 h0.8 r22.5
S9: Top Overlay "O" at 3.736,-41.349 h0.8; Top Overlay "-" at -3.884,-41.241 h0.8; Top Overlay "+" at -1.471,-41.228 h0.8
S10: Top Overlay "O" at -13.463,-39.219 h0.8 r337.5; Top Overlay "-" at -20.461,-36.204 h0.8 r337.5; Top Overlay "+" at -18.227,-37.115 h0.8 r337.5
S11: Top Overlay "O" at -27.138,-31.498 h0.8 r315; Top Overlay "-" at -32.449,-26.033 h0.8 r315; Top Overlay "+" at -30.734,-27.73 h0.8 r315
S12: Top Overlay "O" at -36.711,-19.496 h0.8 r292.5; Top Overlay "-" at -39.527,-12.415 h0.8 r292.5; Top Overlay "+" at -38.592,-14.639 h0.8 r292.5
S13: Top Overlay "O" at -41.349,-3.609 h0.8 r270; Top Overlay "-" at -41.241,4.011 h0.8 r270; Top Overlay "+" at -41.228,1.598 h0.8 r270
S14: Top Overlay "O" at -39.473,12.701 h0.8 r247.5; Top Overlay "-" at -36.458,19.699 h0.8 r247.5; Top Overlay "+" at -37.369,17.465 h0.8 r247.5
S15: Top Overlay "O" at -31.414,27.199 h0.8 r225; Top Overlay "-" at -25.95,32.511 h0.8 r225; Top Overlay "+" at -27.647,30.796 h0.8 r225
S16: Top Overlay "O" at -18.861,36.965 h0.8 r202.5; Top Overlay "-" at -11.78,39.781 h0.8 r202.5; Top Overlay "+" at -14.004,38.846 h0.8 r202.5
STM32: Top Overlay "BOOT0" at 75.633,10.967 h0.15 r90; Top Overlay "VDD/VCC" at 78.077,12.332 h0.15 r90; Top Overlay "OSC_IN" at 76.081,10.967 h0.15 r90; Top Overlay "OSC_OUT" at 76.734,10.967 h0.15 r90; Top Overlay "NRST" at 77.413,10.967 h0.15 r90; Top Overlay "VDDA" at 78.066,10.967 h0.15 r90; Top Overlay "PA0" at 78.719,10.967 h0.15 r90; Top Overlay "PA1" at 79.372,10.967 h0.15 r90; Top Overlay "PA2" at 80.025,10.967 h0.15 r90; Top Overlay "PA3" at 80.678,10.967 h0.15 r90; Top Overlay "PA4" at 81.24,10.962 h0.15 r90; Top Overlay "PA14" at 75.625,12.807 h0.15 r90; Top Overlay "PA13" at 76.097,12.807 h0.15 r90; Top Overlay "PA10" at 76.751,12.807 h0.15 r90; Top Overlay "PA9" at 77.404,12.932 h0.15 r90; Top Overlay "VSS/GND" at 78.729,12.332 h0.15 r90; Top Overlay "PB1" at 79.364,12.982 h0.15 r90; Top Overlay "PA7" at 80.017,12.932 h0.15 r90; Top Overlay "PA6" at 80.67,12.932 h0.15 r90; Top Overlay "PA5" at 81.24,12.932 h0.15 r90